# Altium PCB sensors_0v2.PcbDoc
Units mm, origin at the board's own origin, x right, y up, seen from the top; angles counter-clockwise.
Board outline 100 x 100 mm, 2 copper layers (Top Layer, Bottom Layer); 149 components, 94 nets, 458 pads, 210 vias.
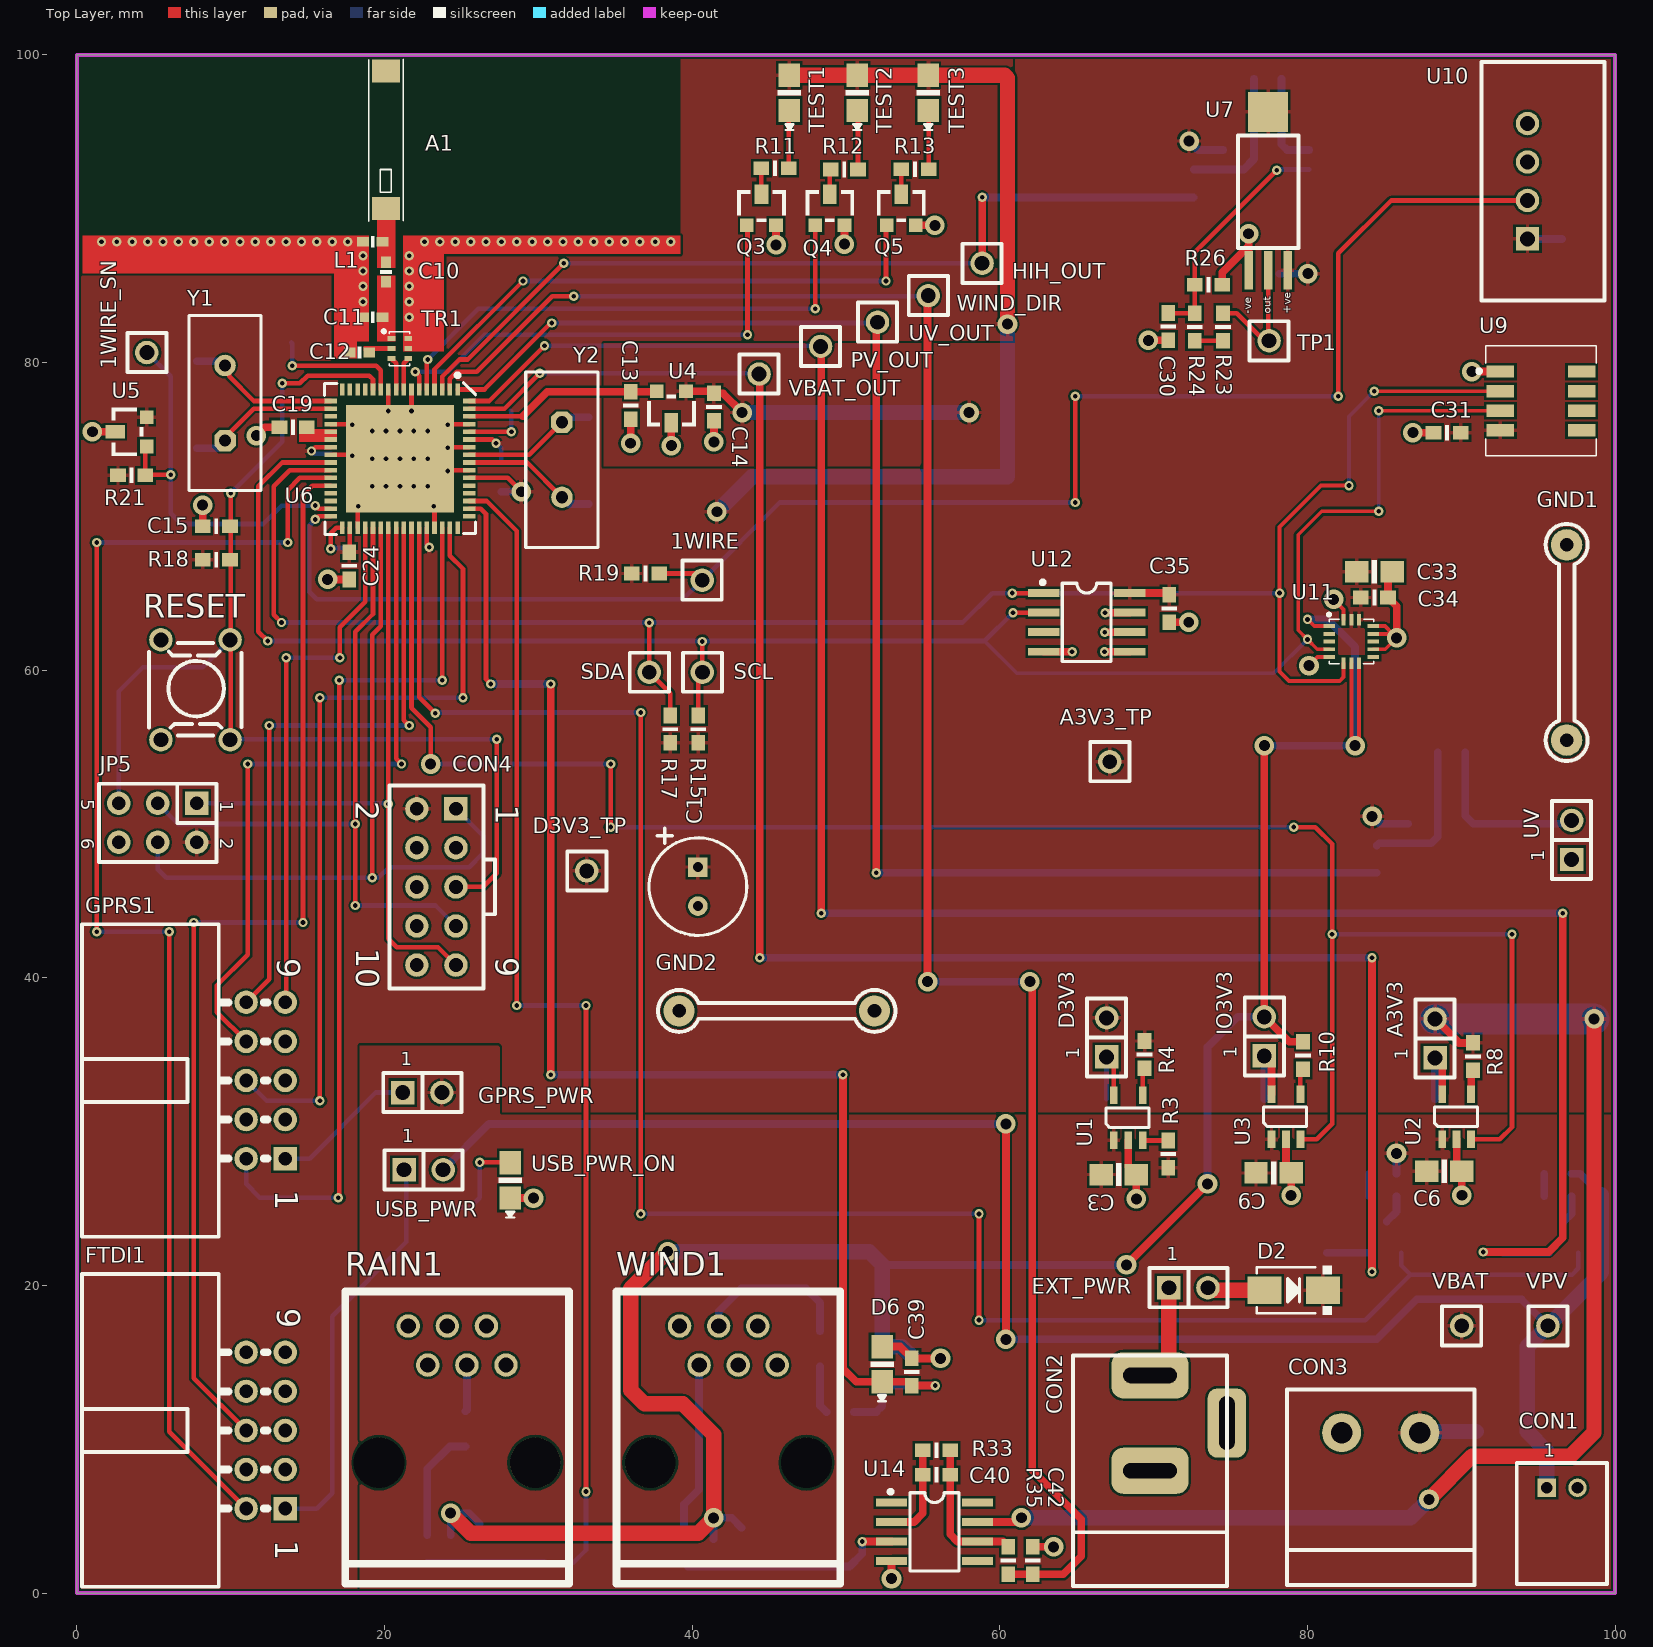
[diagram p0: Top Layer view]
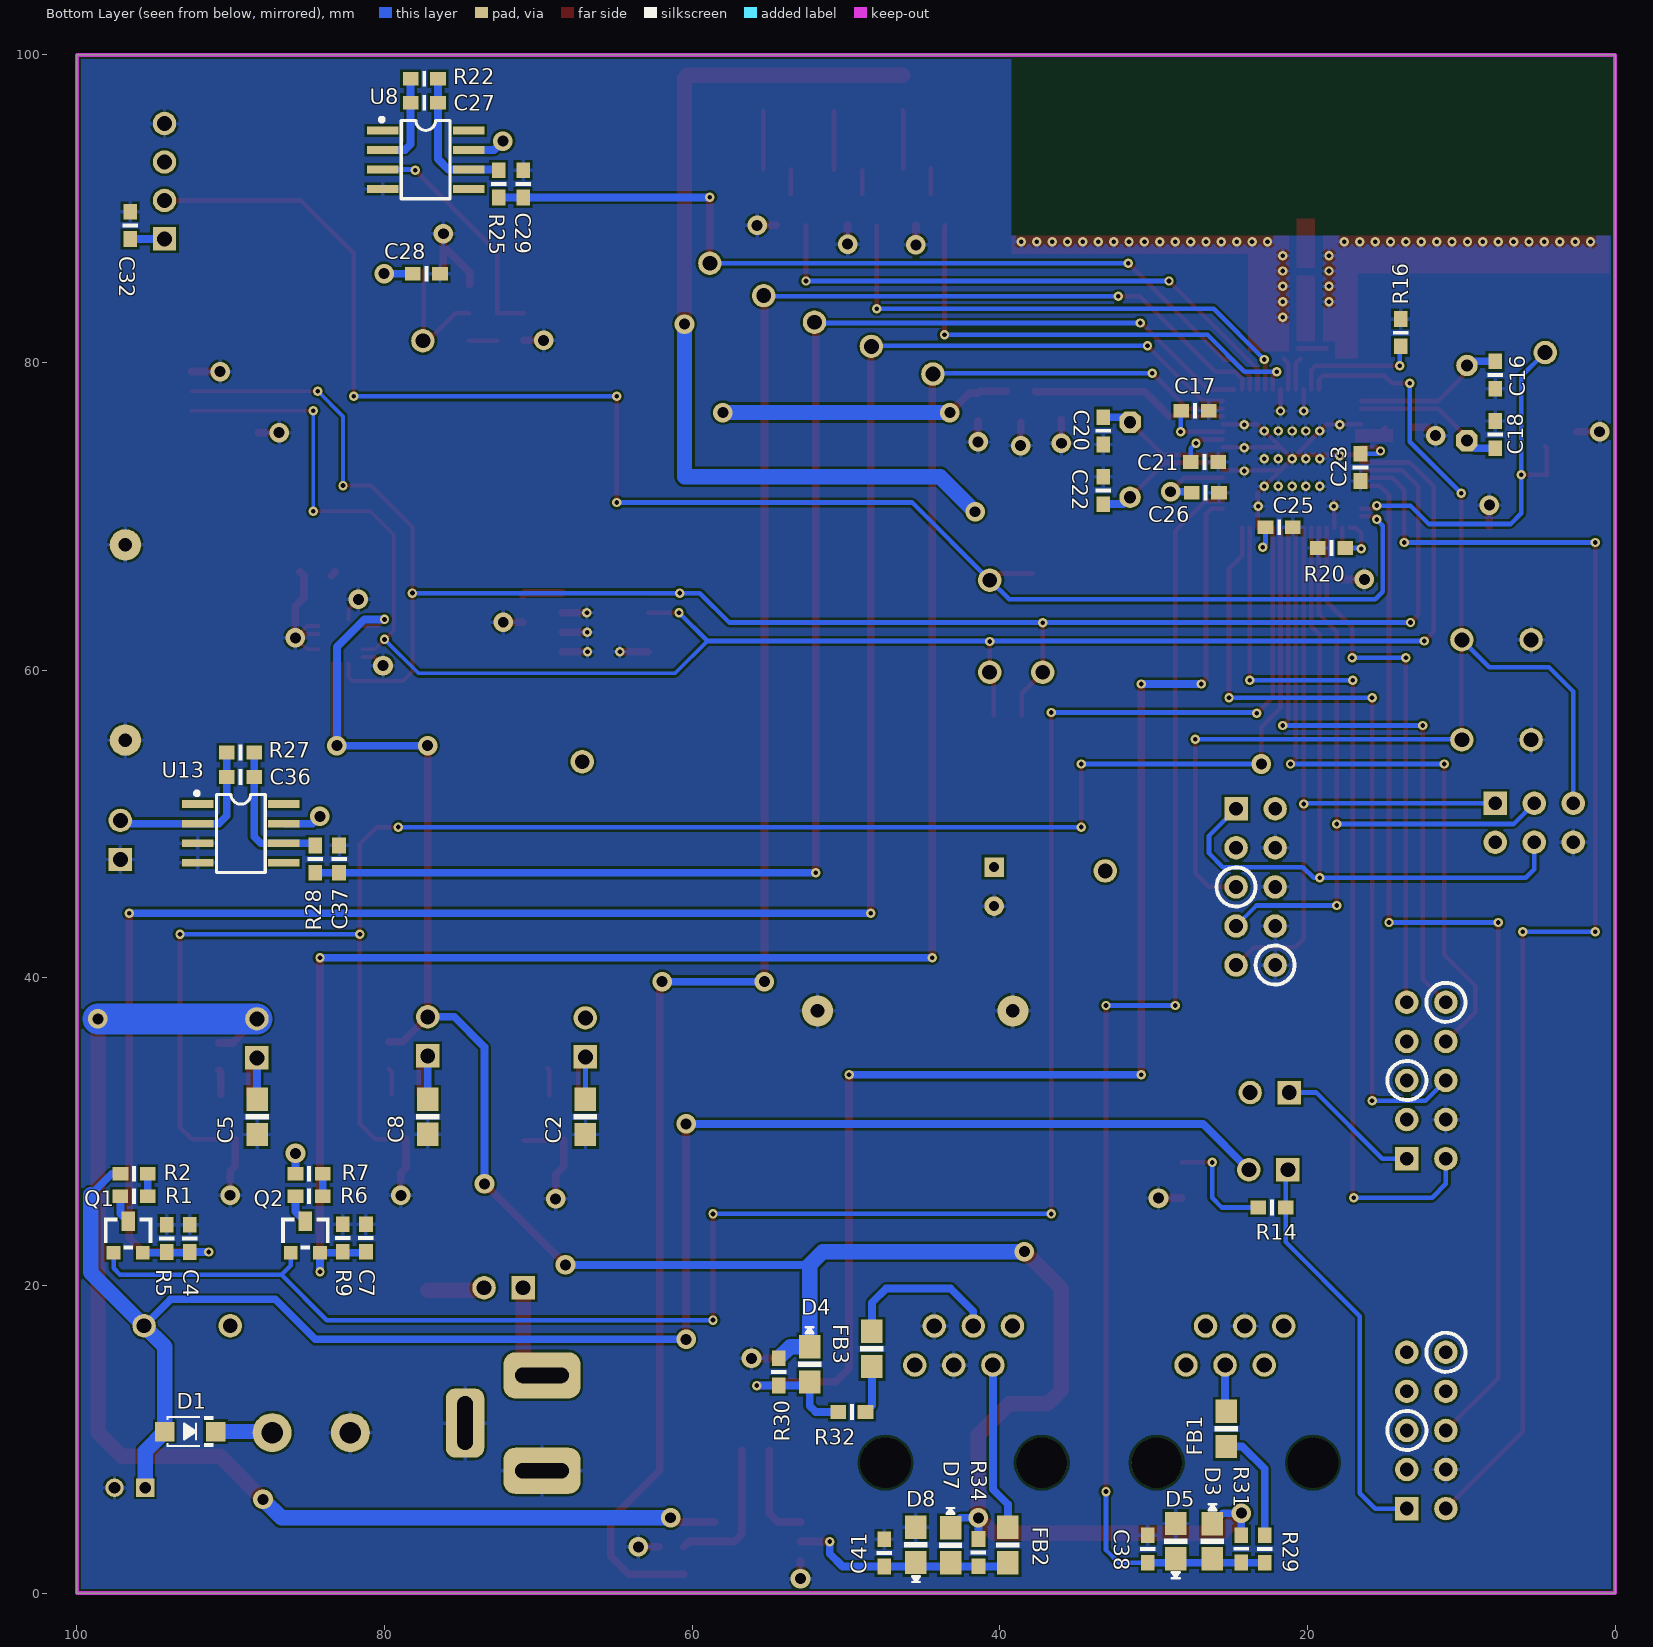
[diagram p1: Bottom Layer view, seen from below]

## Layer stack, top to bottom
Top Layer: signal copper 0.0356
Dielectric: dielectric 0.32, FR-4, Dk 4.8
Bottom Layer: signal copper 0.0356

## Board outline
0,0 100,0 100,100 0,100 0,0

## Design rules (kind name [scope] priority, off if disabled: settings)
Clearance [All] p1: gap=0.152
HoleSize [All] p1: absolutevalues=TRUE maxlimit=2.54 minlimit=0.305 maxpercent=80.000 minpercent=20.000
PolygonConnect [All] p1: connectstyle=Relief reliefconductorwidth=0.254 reliefentries=4 polygonreliefangle="90 Angle"
RoutingVias [All] p1: holewidth=0.508 width=0.762 viastyle="Through Hole" minholewidth=0.305 minwidth=0.61 maxholewidth=0.711 maxwidth=1.27
SilkscreenOverComponentPads [All] p1: minsilkscreentomaskgap=0.254
SolderMaskExpansion [All] p1: expansion=0.102
Width [All] p1: maxlimit=2.54 minlimit=0.152 preferedwidth=0.254
26 further rules are at their usual default settings.

## Classes and differential pairs
component class U_weatherstation: C38 C39 C40 C41 C42 D3 D4 D5 D6 D7 D8 FB1 FB2 FB3 R29 R30 R31 R32 R33 R34 R35 RAIN1 U14 WIND1
component class U_uv: C36 C37 R27 R28 U13 UV
component class U_temperature: C35 U12
component class U_pressure: C33 C34 U11
component class U_power: A3V3_TP C1 C2 C3 C4 C5 C6 C7 C8 C9 CON1 CON2 CON3 D1 D2 D3V3_TP EXT_PWR IO3V3 Q1 Q2 R1 R2 R3 R4 R5 R6 R7 R8 R9 R10 U1 U2 U3 VBAT VPV
component class U_humidity: C27 C28 C29 C30 C31 C32 R22 R23 R24 R25 R26 TP1 U7 U8 U9 U10
component class U_atmega128rf: 1WIRE 1WIRE_SN A1 A3V3_TP C10 C11 C12 C13 C14 C15 C16 C17 C18 C19 C20 C21 C22 C23 C24 C25 C26 CON4 D3V3_TP FTDI1 GND1 GND2 GPRS1 GPRS_PWR HIH_OUT JP5 L1 PV_OUT Q3 Q4 Q5 R11 R12 R13 R14 R15 R16 R17 R18 R19 R20 R21 RESET SCL SDA TEST1 TEST2 TEST3 TR1 U4 U5 U6 USB_PWR USB_PWR_ON UV_OUT VBAT_OUT WIND_DIR Y1 Y2

## Components (designator, comment, footprint, x,y, rotation, side; value= is the part's Value field where it differs from the comment)
1WIRE "Test Point" TERMINAL 40.65,65.85 r90 top
1WIRE_SN "Test Point" TERMINAL 4.55,80.65 r90 top
A1 "2450AT45A100E" 2450AT45A100E 20.1,89.95 r90 top
A3V3 "2P" SIP-2 88.295,34.791 r90 top
A3V3_TP "Test Point" TERMINAL 67.15,54.05 r90 top
C1 "100uF" RADIAL-2.5MM 40.374,47.202 r270 top
C2 "10uF" 0805 66.937,29.813 r90 bottom
C3 "4.7uF" 0805 68.875,27.213 r180 top
C4 "10nF" 0603 92.659,23.954 r270 bottom
C5 "1uF" 0805 88.287,29.813 r90 bottom
C6 "4.7uF" 0805 90.034,27.413 r180 top
C7 "10nF" 0603 81.209,23.97 r270 bottom
C8 "1uF" 0805 77.187,29.831 r90 bottom
C9 "4.7uF" 0805 78.941,27.313 r180 top
C10 "1.5pF" 0402 20.1,85.25 r90 top (schematic designator C4)
C11 "1.5pF" 0402 18.6,82.95 r0 top (schematic designator C5)
C12 "22pF" 0402 19,80.65 r180 top (schematic designator C8)
C13 "1uF" 0603 36.003,78.1 r270 top
C14 "1uF" 0603 41.415,78.001 r270 top
C15 "10nF" 0603 9.951,69.359 r180 top
C16 "12pF" 0603 7.8,78.299 r90 bottom
C17 "1uF" 0603 28.201,76.863 r180 bottom
C18 "12pF" 0603 7.8,76.201 r270 bottom
C19 "1uF" 0603 14.951,75.8 r180 top
C20 "12pF" 0603 33.28,76.451 r270 bottom
C21 "1uF" 0603 25.799,73.535 r0 bottom
C22 "12pF" 0603 33.28,70.799 r90 bottom
C23 "1uF" 0603 16.552,72.299 r90 bottom
C24 "1uF" 0603 17.705,65.899 r90 top
C25 "1uF" 0603 20.949,69.297 r0 bottom
C26 "1uF" 0603 25.749,71.539 r0 bottom
C27 "100pF" 0603 78.305,96.896 r180 bottom
C28 "100nF" 0603 76.395,85.775 r0 bottom
C29 "100nF" 0603 70.99,92.505 r270 bottom
C30 "100nF" 0603 70.956,81.445 r90 top
C31 "100nF" 0603 88.195,75.445 r0 top
C32 "100nF" 0603 96.539,89.805 r270 bottom
C33 "10uF" 0805 85.498,66.389 r180 top
C34 "100nF" 0603 85.236,64.727 r180 top
C35 "100nF" 0603 71.005,63.116 r90 top
C36 "100pF" 0603 90.256,53.059 r180 bottom
C37 "100nF" 0603 82.955,48.606 r270 bottom
C38 "10nF" 0603 30.38,3.757 r270 bottom
C39 "10nF" 0603 54.28,15.257 r270 top
C40 "100pF" 0603 54.993,7.69 r0 top
C41 "100pF" 0603 47.523,3.507 r270 bottom
C42 "100nF" 0603 62.143,3.007 r270 top
CON1 "2P" JST-2MM 95.555,6.851 r0 top
CON2 "3P" JACKPOW/PD-2.5MM-TH 69.764,14.154 r270 top
CON3 "2P" INTERLOCK2-5MM 87.304,10.431 r180 top
CON4 "ICSP" IDC-10-F 24.644,50.989 r270 top
D1 "PMEG2010E" SOD-123 94.288,10.505 r180 bottom
D2 "RGF1D" DO-214BA 79.101,19.687 r0 top
D3 "MCL4148" 0805@DIODE 26.182,2.223 r90 bottom
D3V3 "2P" SIP-2 66.945,34.855 r90 top
D3V3_TP "Test Point" TERMINAL 33.15,46.95 r90 top
D4 "MCL4148" 0805@DIODE 52.364,13.723 r90 bottom
D5 "MCL4148" 0805@DIODE 28.566,4.527 r270 bottom
D6 "MCL4148" 0805@DIODE 52.344,16.027 r270 top
D7 "MCL4148" 0805@DIODE 43.205,1.973 r90 bottom
D8 "MCL4148" 0805@DIODE 45.459,4.277 r270 bottom
EXT_PWR "2P" SIP-2 70.989,19.855 r0 top
FB1 "150Z_100MHz" 0805 25.267,9.533 r90 bottom
FB2 "150Z_100MHz" 0805 39.472,4.269 r270 bottom
FB3 "150Z_100MHz" 0805 48.314,17.019 r270 bottom
FTDI1 "10P" IDC-10-90 12.27,10.575 r270 top
GND1 "Test Point" TEST-PROBE2 96.85,55.45 r90 top
GND2 "Test Point" TEST-PROBE2 51.85,37.85 r180 top
GPRS1 "10P" IDC-10-90 12.27,33.325 r270 top
GPRS_PWR "2P" SIP-2 21.188,32.542 r0 top
HIH_OUT "Test Point" TERMINAL 58.85,86.45 r90 top
IO3V3 "2P" SIP-2 77.195,34.923 r90 top
JP5 "6P" DIL-6 7.795,51.347 r270 top
L1 "3.9nH" 0402 18.6,87.85 r0 top
PV_OUT "Test Point" TERMINAL 48.35,81.05 r90 top
Q1 "BSS138" SOT-23@GSD 97.615,22.132 r180 bottom
Q2 "BSS138" SOT-23@GSD 86.104,22.132 r180 bottom
Q3 "BSS138" SOT-23@GSD 43.549,88.918 r0 top
Q4 "BSS138" SOT-23@GSD 47.994,88.918 r0 top
Q5 "BSS138" SOT-23@GSD 52.639,88.918 r0 top
R1 "20k" 0603 97.17,25.791 r180 bottom
R2 "20k" 0603 95.39,27.259 r0 bottom
R3 "10k" 0603 70.941,29.425 r270 top
R4 "100k" 0603 69.409,34.114 r90 top
R5 "20k" 0603 94.159,23.954 r270 bottom
R6 "20k" 0603 85.79,25.791 r180 bottom
R7 "20k" 0603 84.011,27.259 r0 bottom
R8 "100k" 0603 90.759,33.991 r90 top
R9 "20k" 0603 82.709,23.97 r270 bottom
R10 "100k" 0603 79.712,34.063 r90 top
R11 "470R" 0603 44.499,92.628 r0 top
R12 "470R" 0603 48.999,92.548 r0 top
R13 "470R" 0603 53.599,92.56 r0 top
R14 "470R" 0603 23.201,25.066 r180 bottom
R15 "10k" 0603 40.404,57.051 r270 top
R16 "10K" 0603 13.942,81.049 r90 bottom
R17 "10k" 0603 38.58,57.051 r270 top
R18 "10K" 0603 9.951,67.187 r180 top
R19 "2.2k" 0603 37.851,66.282 r180 top
R20 "10K" 0603 17.549,67.94 r0 bottom
R21 "2.2k" 0603 4.451,72.664 r180 top
R22 "10K" 0603 78.305,98.449 r180 bottom
R23 "20K" 0603 74.509,83.205 r270 top
R24 "20K" 0603 72.667,83.205 r270 top
R25 "300R" 0603 72.582,92.505 r270 bottom
R26 "20K" 0603 74.455,85.048 r180 top
R27 "300R" 0603 90.256,54.651 r180 bottom
R28 "300R" 0603 84.513,48.606 r270 bottom
R29 "200R" 0603 22.784,3.757 r270 bottom
R30 "10K" 0603 54.374,13.493 r90 bottom
R31 "10K" 0603 24.3,1.993 r90 bottom
R32 "200R" 0603 50.507,11.778 r180 bottom
R33 "10K" 0603 54.993,9.282 r0 top
R34 "220K" 0603 41.391,1.743 r90 bottom
R35 "300R" 0603 60.551,3.007 r270 top
RAIN1 "RJ25" RJ25 21.546,17.366 r0 top
RESET "SW1" MICROSWITCH 5.462,61.973 r0 top
SCL "Test Point" TERMINAL 40.661,59.865 r90 top
SDA "Test Point" TERMINAL 37.212,59.865 r90 top
TEST1 "LED" 0805@DIODE 46.318,98.671 r270 top
TEST2 "LED" 0805@DIODE 50.736,98.671 r270 top
TEST3 "LED" 0805@DIODE 55.346,98.671 r270 top
TP1 "Test Point" TERMINAL 77.506,81.411 r0 top
TR1 "2450FB15L0001E" 0805@BALUN 21.45,80.25 r90 top
U1 "MCP1824T" SOT-23-5 67.409,29.447 r90 top
U2 "MCP1824T" SOT-23-5 88.759,29.51 r90 top
U3 "MCP1824T" SOT-23-5 77.659,29.515 r90 top
U4 "REF3312" SOT-23 39.598,78.132 r180 top
U5 "DS2411" SOT-23 4.532,74.546 r90 top
U6 "ATmega128RFA1" QFN-64@EP 21,73.75 r270 top (schematic designator U4)
U7 "HIH-5031" HIH 76.174,85.997 r0 top
U8 "MCP6071" SOIC-8 77.324,93.187 r180 bottom
U9 "SHT11" SHT 92.541,79.408 r0 top
U10 "DHT22" DHT22 94.304,88.036 r90 top
U11 "LPS331AP" HCLGA-16 81.428,62.861 r0 top
U12 "TMP175" SOIC-8 65.649,63.108 r0 top
U13 "MCP6V26" SOIC-8 89.343,49.386 r180 bottom
U14 "MCP6071" SOIC-8 55.753,3.985 r0 top
USB_PWR "2P" SIP-2 21.271,27.52 r0 top
USB_PWR_ON "LED" 0805@DIODE 28.168,27.971 r270 top
UV "2P" SIP-2 97.175,47.694 r90 top
UV_OUT "Test Point" TERMINAL 52.05,82.622 r90 top
VBAT "Test Point" TERMINAL 90.028,17.379 r90 top
VBAT_OUT "Test Point" TERMINAL 44.35,79.25 r90 top
VPV "Test Point" TERMINAL 95.631,17.379 r90 top
WIND1 "RJ25" RJ25 39.179,17.366 r0 top
WIND_DIR "Test Point" TERMINAL 55.35,84.35 r90 top
Y1 "32.768kHz" HC-49U 9.63,77.37 r90 top
Y2 "16MHz" HC-49U 31.533,73.68 r270 top

## Footprints (in the part's own frame and the unit in brackets; to place one, negate y for a bottom-side part, rotate by r counter-clockwise, add the part's x,y. Pads: shape width x height; smd on the part's side, far side on the other; paste and mask are expansions set on the pad)
0402 [mil]
  rect 30x25 smd: 1(0,0) 2(50,0)
  silkscreen extent 20,-15 30,15
0603 [mil]
  rect 40x35 smd: 1(0,0) 2(70,0)
  silkscreen extent 30,-20 40,20
0805 [mil]
  rect 60x55 smd: 1(0,0) 2(90,0)
  silkscreen extent 38,-30 52,30
0805@BALUN [mm]
  rect 0.32x0.5 smd: 1(1.3,1) 2(0.65,1) 3(0,1) 4(0,-0.1) 5(0.65,-0.1) 6(1.3,-0.1)
  silkscreen extent -0.46,-0.2 1.88,1.6
0805@DIODE [mil]
  rect 60x55 smd: A(0,0) K(90,0)
  silkscreen extent 38,-30 140,30
2450AT45A100E [mm]
  rect 1.5x1.8 smd: 1(0.05,0) ""(9,0)
  silkscreen extent -0.75,-1.12 9.75,1.12
DHT22 [mil] "DHT22 humidity sensor footprint"
  rect 60x60 hole 38: 1(0,0)
  round 60 hole 38: 2(98.43,0) 3(196.85,0) 4(295.28,0)
  silkscreen extent -157,-197 453,118
DIL-6 [mil] "Dual inline 2x3 pins 2.54mm pitch"
  rect 60x60 hole 35: 1(0,0)
  round 60 hole 35: 2(100,0) 3(0,-100) 4(100,-100) 5(0,-200) 6(100,-200)
  silkscreen extent -50,-250 150,50
DO-214BA [mm] "Small Signal Schottky Diode"
  rect 2.2x1.8 smd: A(-1.9,0) K(1.9,0)
  silkscreen extent -2.4,-1.6 2.5,1.6
HC-49U [mm] "Quartz Crystal, Thru-Hole; 2 Leads; Body 11.35 x 4.65 x 13.46 mm (LxWxH max)"
  oct 1.4x1.4 hole 0.8: 1(-2.44,0)
  round 1.4 hole 0.8: 2(2.44,0)
  silkscreen extent -5.7,-2.35 5.7,2.35
HCLGA-16 [mm]
  rect 0.75x0.25 smd: 1(0,0) 2(0,-0.5) 3(0,-1) 4(0,-1.5) 5(0,-2) 9(2.85,-2) 10(2.85,-1.5) 11(2.85,-1) 12(2.85,-0.5) 13(2.85,0)
  rect 0.25x0.75 smd: 6(0.925,-2.425) 7(1.425,-2.425) 8(1.925,-2.425) 14(1.925,0.425) 15(1.425,0.425) 16(0.925,0.425)
  silkscreen extent -0.12,-2.45 2.88,0.85
HIH [mm] "Honeywell Humidity Sensor"
  rect 0.55x2.5 smd: 1(0,0) 2(1.27,0) 3(2.54,0)
  rect 2.6x2.6 smd: PAD(1.27,10.3)
  silkscreen extent -0.7,1.45 3.25,8.77
IDC-10-90 [mil]
  rect 60x60 hole 35: 1(200,50)
  round 60 hole 35: 2(200,-50) 3(100,50) 4(100,-50) 5(0,50) 6(0,-50) 7(-100,50) 8(-100,-50) 9(-200,50) 10(-200,-50)
  silkscreen extent -400,-470 400,5
IDC-10-F [mil]
  rect 60x60 hole 35: 1(0,0)
  round 60 hole 35: 2(0,-100) 3(100,0) 4(100,-100) 5(200,0) 6(200,-100) 7(300,0) 8(300,-100) 9(400,0) 10(400,-100)
  silkscreen extent -60,-170 460,100
INTERLOCK2-5MM [mil]
  round 100 hole 55: 1(0,0) 2(200,0)
  silkscreen extent -140,-110 340,390
JACKPOW/PD-2.5MM-TH [mm] "Jack Power 2.5mm with insertion detect - Through Hole"
  rrect50% 3x5 hole 1 slot 3.5 at 90 deg: 1(0,0) 2(6.2,0)
  rrect50% 4.5x2.5 hole 1 slot 3.5 at 0 deg: 3(3.1,5)
  silkscreen extent -1.3,-5 13.7,5
JST-2MM [mm] "JST 2mm header side entry"
  rect 1.2x1.2 hole 0.762: 1(0,0)
  round 1.2 hole 0.762: 2(2,0)
  silkscreen extent -1.95,-6.25 3.93,1.6
MICROSWITCH [mil]
  round 60 hole 38: 1(0,0) 2(177.16,0) 3(0,-255.91) 4(177.16,-255.91)
  silkscreen extent -30,-245 206,-8
QFN-64@EP [mm]
  rect 0.8x0.3 smd: 1(-4.5,3.75) 2(-4.5,3.25) 3(-4.5,2.75) 4(-4.5,2.25) 5(-4.5,1.75) 6(-4.5,1.25) 7(-4.5,0.75) 8(-4.5,0.25) 9(-4.5,-0.25) 10(-4.5,-0.75) 11(-4.5,-1.25) 12(-4.5,-1.75) 13(-4.5,-2.25) 14(-4.5,-2.75) 15(-4.5,-3.25) 16(-4.5,-3.75) 33(4.5,-3.75) 34(4.5,-3.25) 35(4.5,-2.75) 36(4.5,-2.25) 37(4.5,-1.75) 38(4.5,-1.25) 39(4.5,-0.75) 40(4.5,-0.25) 41(4.5,0.25) 42(4.5,0.75) 43(4.5,1.25) 44(4.5,1.75) 45(4.5,2.25) 46(4.5,2.75) 47(4.5,3.25) 48(4.5,3.75)
  rect 0.3x0.8 smd: 17(-3.75,-4.5) 18(-3.25,-4.5) 19(-2.75,-4.5) 20(-2.25,-4.5) 21(-1.75,-4.5) 22(-1.25,-4.5) 23(-0.75,-4.5) 24(-0.25,-4.5) 25(0.25,-4.5) 26(0.75,-4.5) 27(1.25,-4.5) 28(1.75,-4.5) 29(2.25,-4.5) 30(2.75,-4.5) 31(3.25,-4.5) 32(3.75,-4.5) 49(3.75,4.5) 50(3.25,4.5) 51(2.75,4.5) 52(2.25,4.5) 53(1.75,4.5) 54(1.25,4.5) 55(0.75,4.5) 56(0.25,4.5) 57(-0.25,4.5) 58(-0.75,4.5) 59(-1.25,4.5) 60(-1.75,4.5) 61(-2.25,4.5) 62(-2.75,4.5) 63(-3.25,4.5) 64(-3.75,4.5)
  rect 7x7 smd: PAD(0,0)
  silkscreen extent -5.55,-4.9 4.93,4.92
RADIAL-2.5MM [mil]
  rect 50x50 hole 26: 1(0,0)
  round 50 hole 26: 2(100,0)
  silkscreen extent -100,-125 175,125
RJ25 [mm]
  round 1.524 hole 1: 1(0,0) 2(1.27,-2.54) 3(2.54,0) 4(3.81,-2.54) 5(5.08,0) 6(6.35,-2.54)
  round 3.25 hole 3.3: ""(-1.905,-8.89) ""(8.255,-8.89)
  silkscreen extent -4.1,-16.76 10.45,2.24
SHT [mm] "Sensirion SHTx Humidity Sensor Footprint"
  rect 1.8x0.8 smd: 1(0,0.005) 2(0,-1.27) 3(0,-2.54) 4(0,-3.81) 5(5.28,-3.81) 6(5.28,-2.54) 7(5.28,-1.27) 8(5.28,0.005)
  silkscreen extent -1.51,-5.48 6.23,1.68
SIP-2 [mil]
  rect 60x60 hole 38: 1(0,0)
  round 60 hole 38: 2(100,0)
  silkscreen extent -50,-50 150,50
SOD-123 [mil]
  rect 50x50 smd: A(0,0) K(130,0)
  silkscreen extent 5,-40 125,40
SOIC-8 [mil] "Small Outline 8 leads Body Size 150mils"
  rect 80x20 smd: 1(-110,75) 2(-110,25) 3(-110,-25) 4(-110,-75) 5(110,-75) 6(110,-25) 7(110,25) 8(110,75)
  silkscreen extent -117,-100 63,107
SOT-23 [mil]
  rect 35x35 smd: 1(0,0) 2(75,0)
  rect 35x50 smd: 3(37.5,80)
  silkscreen extent -25,8 100,90
SOT-23-5 [mil]
  rect 45x20 smd: 1(0,0) 2(0,-37) 3(0,-74) 4(115,-74) 5(115,0)
  silkscreen extent 32,-90 82,20
SOT-23@GSD [mil] "SOT-23 (1-Gate , 2-Source, 3-Drain)"
  rect 35x50 smd: D(37.5,80)
  rect 35x35 smd: G(0,0) S(75,0)
  silkscreen extent -25,8 100,90
TERMINAL [mil]
  round 60 hole 37.99: 1(0,0)
  silkscreen extent -50,-50 50,50
TEST-PROBE2 [mil]
  round 80 hole 35: 1(0,0) 1(500,0)
  silkscreen extent -54,-54 554,54

## Part data
1WIRE 1WIRE_SN A3V3_TP D3V3_TP GND1 GND2 HIH_OUT PV_OUT SCL SDA TP1 UV_OUT VBAT VBAT_OUT VPV WIND_DIR: library part TEST-PROBE, "Test/Probe Point"
A1: library part "Antenna SE", "ANTENNA"
A3V3 D3V3 EXT_PWR GPRS_PWR IO3V3 USB_PWR UV: library part JMP2, "2-pin Jumper"
C1: library part "CAP POL", "Polarized Capacitor"
C2 C3 C4 C5 C6 C7 C8 C9 C10 C11 C12 C13 C14 C15 C16 C17 C18 C19 C20 C21 C22 C23 C24 C25 C26 C27 C28 C29 C30 C31 C32 C33 C34 C35 C36 C37 C38 C39 C40 C41 C42: library part CAP, "Capacitor"
CON1 CON3: library part CON02, "Connector 2 pins"
CON2: library part "JACK POWER PD", "Jack Power with insertion detect"
CON4 FTDI1 GPRS1: library part CON10, "Connector 10 Pins"
D1: library part "Diode Schottky", "Small Signal Schottky Diode"
D2 D3 D4 D5 D6 D7 D8: library part Diode, "Vishay Standard Avalanche Sinterglass Diode"
FB1 FB2 FB3: library part FERRITE-BEAD-AXIAL, "Ferrite bead"
JP5: library part JMP6, "6-Pin Jumper"
L1: library part IND, "Inductor"
Q1 Q2 Q3 Q4 Q5: library part MOSFET-N, "N-Channel Logic Level Enhancement Mode Field Effect Transistor"
R1 R2 R3 R4 R5 R6 R7 R8 R9 R10 R11 R12 R13 R14 R15 R16 R17 R18 R19 R20 R21 R22 R23 R24 R25 R26 R27 R28 R29 R30 R31 R32 R33 R34 R35: library part RES, "Resistor"
RAIN1 WIND1: "RJ25 Connector"
RESET: "Switch Push Button"
TEST1 TEST2 TEST3 USB_PWR_ON: "Light emitting diode"
TR1: "FILTER BALUN ATMEL 2.45GHZ"
U1 U2 U3: "300 mA, Low Voltage, Low Quiescent Current LDO Regulator, 5-Pin SOT-23, Extended Temperature, Tape and Reel"
U4: "Voltage Reference 1.25V, 30ppm/degC, 5mA"
U5: "Silicon Serial Number"
U6: "802.15.4 compliant AVR transceiver"
U7: "Low Voltage Humidity Sensor"
U8 U14: library part MCP6V26, "Low-Offset Opamp"
U9 U10: "Digital Humidity and Temperature Sensor"
U11: "Pressure sensor, 260 - 1260 mbar"
U12: "Digital Temperature Sensor"
U13: "Low-Offset Opamp"
Y1 Y2: library part "Crystal Oscillator", "Crystal Oscillator"

## Via types
v1: diameter 0.61, hole 0.305, Top Layer to Bottom Layer, 161 vias
v2: diameter 1.27, hole 0.711, Top Layer to Bottom Layer, 49 vias

## Nets (pads, with @x,y where several pads share a name; then routed paths per layer and width w, separated by ;. In a path a pad name is that pad's centre, name@x,y a point inside that pad or via, vN(x,y) a via of type N, cw(c..) or ccw(c..) an arc to the next point about the centre after c; other vN are vias at no path point)
1WIRE: 1WIRE.1 R19.1 U6.32 U10.2 | length 108.6
  Top Layer w0.3: v1(15.5,69.8) 15.7,70 U6.32 ; R19.1 40.218,66.282 1WIRE.1 ; v1(64.9,70.9) v1(64.9,77.8) ; v1(82,77.8) 82,87.1 85.436,90.536 U10.2
  Bottom Layer w0.3: v1(15.5,69.8) 15.1,69.4 15.1,65.1 15.6,64.6 39.4,64.6 1WIRE.1 45.7,70.9 v1(64.9,70.9) ; v1(64.9,77.8) v1(82,77.8)
1WIRE_SN: 1WIRE_SN.1 R21.1 U5.1 U6.31 | length 25.9
  Top Layer w0.3: U5.1 4.451,74.465 R21.1 4.487,72.7 v1(6.1,72.7) ; v1(15.5,70.7) 15.7,70.5 U6.31
  Bottom Layer w0.3: 1WIRE_SN.1 6.1,79.1 v1(6.1,72.7) 6.1,70.2 6.8,69.5 12.1,69.5 13.3,70.7 v1(15.5,70.7)
A3V3: A3V3.2 A3V3_TP.1 C14.1 C28.2 C31.2 C32.2 C33.2 C34.2 C35.2 R8.2 U4.1 U7.3 U7.PAD U8.7 U9.4 U10.1 U11.14 U11.15 U12.8 U13.7 U14.7 | length 113.7
  Top Layer w0.5: U4.1 C14.1@41.284,78.132 ; C14.1 41.999,78.001 v2(43.25,76.75) ; U14.7 61.12,4.62 v2(61.4,4.9) ; A3V3.2 89.857,35.769 R8.2
  Top Layer w0.508: U12.8 70.886,65.013 C35.2 ; C33.2 C33.2@83.458,66.143
  Top Layer w1: v2(87.9,6.1) 90.7,8.9 97.1,8.9 98.631,10.431 v2(98.631,37.331)
  Bottom Layer w0.5: C28.2 v2(80.025,85.775) ; v2(84.2,50.5) 84.679,50.021 U13.7
  Bottom Layer w0.508: v2(72.3,94.4) 72.878,93.822 U8.7 ; U10.1 96.53,88.036 C32.2
  Bottom Layer w1: v2(43.25,76.75) v2(58,76.75) ; v2(61.4,4.9) 86.7,4.9 v2(87.9,6.1)
  Bottom Layer w2: A3V3.2 v2(98.631,37.331)
AREF: C13.1 U4.2 U6.62 | length 12.9
  Top Layer w0.3: U6.62 28.986,76.5
  Top Layer w0.5: 28.986,76.5 30.586,78.1 C13.1 37.661,78.1 U4.2
D3V3: C1.1 C21.2 C23.2 C24.2 C25.2 C26.2 CON4.2 D3V3.2 D3V3_TP.1 JP5.2 R4.2 R15.2 R17.2 R18.2 R19.2 R21.2 TEST1.A TEST2.A TEST3.A U5.2 U6.23 U6.34 U6.44 U6.54 U6.59 | length 75
  Top Layer w0.3: 15.5,74.5 U6.23 ; C24.2 17.75,67.722 U6.34 ; U6.44 22.75,68.15 v1(22.9,68) ; U6.54 28,72.5 v2(28.9,71.6) ; U6.59 27,75 v1(27.25,74.75)
  Top Layer w1: TEST1.A TEST2.A TEST3.A 60.329,98.671 60.5,98.5 v2(60.5,82.5)
  Bottom Layer w0.3: v1(15.25,74.25) 15.423,74.077 C23.2 ; C25.2 22.727,68.173 v1(22.9,68) ; v1(27.25,74.75) 27.577,74.423 C21.2 ; C26.2 C26.2@27.588,71.6
  Bottom Layer w0.5: C26.2@27.588,71.6 v2(28.9,71.6)
  Bottom Layer w1: v2(41.6,70.3) 43.875,72.575 60.5,72.575 v2(60.5,82.5)
EN_AVDD: U2.3 U3.3 U6.42 | length 126.9
  Top Layer w0.3: U6.42 21.75,57.55 23,56.3 v2(23,53.9) ; v1(34.7,49.8) v1(34.7,53.9) ; v1(79.1,49.8) 80.5,49.8 81.6,48.7 81.6,30.5 80.615,29.515 U3.3 ; U2.3 92.51,29.51 93.3,30.3 v1(93.3,42.825)
  Bottom Layer w0.3: v2(23,53.9) v1(34.7,53.9) ; v1(34.7,49.8) v1(79.1,49.8) ; v1(81.6,42.825) v1(93.3,42.825)
ENZ_2G: GPRS1.8 U6.40 | length 45.1
  Top Layer w0.3: GPRS1.8 9.1,37.765 9.1,39.5 11.1,41.5 v1(11.1,53.9) ; U6.40 20.75,54.25 v1(21.1,53.9)
  Bottom Layer w0.3: v1(11.1,53.9) v1(21.1,53.9)
GND: C1.2 C2.1 C3.1 C4.1 C5.1 C6.1 C7.1 C8.1 C9.1 C11.1 C12.2 C13.2 C14.2 C15.2 C16.1 C17.2 C18.1 C19.2 C20.2 C21.1 C22.2 C23.1 C24.1 C25.1 C26.1 C28.1 C29.1 C30.1 C31.1 C32.1 C33.1 C34.1 C35.1 C37.1 C38.1 C39.1 C41.1 C42.1 CON1.2 CON2.2 CON2.3 CON3.2 CON4.4 CON4.6 CON4.8 CON4.10 D5.A D6.A D8.A FTDI1.4 GND1.1 GND2.1 GPRS1.4 JP5.6 L1.1 Q3.S Q4.S Q5.S R5.1 R9.1 R16.2 R20.2 R26.1 RAIN1.3 RESET.1 RESET.3 TR1.5 TR1.6 U1.2 U2.2 U3.2 U4.3 U5.3 U6.7 U6.10 U6.20 U6.24 U6.35 U6.45 U6.55 U6.58 U6.61 U6.PAD U7.1 U8.4 U9.1 U10.4 U11.5 U11.10 U11.12 U11.13 U11.16 U12.4 U12.5 U12.6 U12.7 U13.3 U13.4 U14.4 USB_PWR_ON.K UV.1 WIND1.4 WIND1.5 | length 97.3
  Top Layer w0.25: v2(80.1,60.3) 80.661,60.861 U11.5 ; v2(81.7,64.6) 82.353,63.947 U11.16 ; U11.10 85.061,61.361 v2(85.8,62.1) v2@85.539,62.361 ; U11.12 v2@85.539,62.361 ; U11.13 85.039,62.861 v2@85.539,62.361
  Top Layer w0.3: U6.24 19.2,74 U6.PAD@20.75,74 ; U6.20 18.75,76 v1(21,73.75) ; U6.35 U6.PAD@18.25,71 ; v1(20.25,76.85) U6.10 ; U6.PAD@21.75,73 U6.55 ; U6.PAD@21.75,74.5 U6.58 ; v1(21.75,76.85) U6.7 ; U6.45 23.25,71.5 v1(21,73.75) ; U6.61 23.25,76 v1(21,73.75)
  Top Layer w0.5: v2(1.001,75.499) U5.3 ; C15.2 v2(8.173,70.727) ; v2(11.673,75.25) 12.223,75.8 C19.2 ; v2(16.305,65.905) 16.311,65.899 C24.1 ; USB_PWR_ON.K v2(29.685,25.685) ; v2(36.003,74.753) C13.2 ; v2(38.646,74.605) U4.3 ; v2(41.415,74.835) C14.2 ; v2(45.454,87.646) Q3.S ; v2(49.899,87.701) Q4.S ; D6.A 53.51,16.027 C39.1 v2(56.143,15.257) ; v2(52.959,0.941) U14.4 ; Q5.S v2(55.782,88.918) ; C42.1 v2(63.493,3.007) ; U12.4 v1(64.697,61.203) ; v1(66.803,61.203) U12.5 ; v1(66.827,62.473) U12.6 ; v1(66.843,63.743) U12.7 ; U1.2 68.349,27.739 C3.1 v2(68.875,25.625) ; v2(69.655,81.445) C30.1 ; C35.1 v2(72.284,63.116) ; R26.1 74.455,85.855 76.174,87.574 ; U7.1 76.174,87.574 ; v2(76.174,88.374) 76.174,87.574 ; U3.2 78.599,27.655 C9.1 v2(78.941,25.859) ; C33.1 85.236,66.127 C34.1 85.8,64.163 v2(85.8,62.1) ; v2(86.855,75.445) C31.1 ; U2.2 89.699,27.748 C6.1 v2(90.034,25.866) ; v2(90.687,79.413) U9.1
  Bottom Layer w0.5: v1(64.697,61.203) v1@64.7,61.2
  other v1: 18.3,70.65 23.2,70.65 19.2,71.95 20.1,71.95 21,71.95 21.9,71.95 22.8,71.95 24.1,72.95 19.2,73.75 20.1,73.75 21.9,73.75 22.8,73.75 17.9,73.95 24.1,74.45 19.2,75.55 20.1,75.55 21,75.55 21.9,75.55 22.8,75.55 17.9,75.95 24.1,75.95 21.6,82.95 18.6,83.95 21.6,83.95 18.6,84.95 21.6,84.95 18.6,85.95 21.6,85.95 18.6,86.95 21.6,86.95 1.6,87.85 2.6,87.85 3.6,87.85 4.6,87.85 5.6,87.85 6.6,87.85 7.6,87.85 8.6,87.85 9.6,87.85 10.6,87.85 11.6,87.85 12.6,87.85 13.6,87.85 14.6,87.85 15.6,87.85 16.6,87.85 17.6,87.85 22.6,87.85 23.6,87.85 24.6,87.85 25.6,87.85 26.6,87.85 27.6,87.85 28.6,87.85 29.6,87.85 30.6,87.85 31.6,87.85 32.6,87.85 33.6,87.85 34.6,87.85 35.6,87.85 36.6,87.85 37.6,87.85 38.6,87.85
HIH_OUT: C29.2 HIH_OUT.1 R25.2 U6.3 | length 57
  Top Layer w0.3: U6.3 23.75,79.09 24.86,80.2 25.4,80.2 v1(31.65,86.45)
  Top Layer w0.5: HIH_OUT.1 v1(58.85,90.75)
  Bottom Layer w0.3: v1(31.65,86.45) HIH_OUT.1
  Bottom Layer w0.508: v1(58.85,90.75) 58.873,90.727 C29.2 R25.2
INT6: U6.52
INT7: U6.53
IO3V3: D3.K D4.K D7.K IO3V3.2 R10.2 R30.2 R31.2 R34.2 U11.1 U11.7 U11.8 | length 155.2
  Top Layer w0.25: v1(80,63.3) 80.439,62.861 U11.1 ; U11.7 82.853,55.337 v2(83.095,55.095) 83.353,55.353 U11.8
  Top Layer w0.5: v2(68.236,21.336) v2(73.5,26.6) ; v2(77.195,55.095) IO3V3.2 78.817,35.841 R10.2
  Top Layer w1: v2(24.3,5.2) 25.6,3.9 40.4,3.9 v2(41.391,4.891) 41.391,10.309 39.4,12.3 36.9,12.3 36,13.2 36,19.8 v2(38.4,22.2)
  Bottom Layer w0.5: R31.2 v2(24.3,5.2) 25.491,5.2 D3.K ; R34.2 v2(41.391,4.891) 42.573,4.891 D7.K ; 52.364,21.336 v2(68.236,21.336) ; v2(73.5,26.6) 73.5,35.5 75.463,37.463 IO3V3.2 ; v2(77.195,55.095) v2(83.095,55.095) 83.095,61.505 81.3,63.3 v1(80,63.3)
  Bottom Layer w1: v2(38.4,22.2) 51.5,22.2 52.364,21.336 D4.K 53.636,16.009 R30.2
LED1: Q3.G U6.6 | length 31
  Top Layer w0.3: v1(22,79.4) 22.25,79.15 U6.6 ; Q3.G 43.6,88.867 v1(43.6,81.8)
  Bottom Layer w0.3: v1(22,79.4) 24.1,79.4 26.5,81.8 v1(43.6,81.8)
LED2: Q4.G U6.5 | length 33.9
  Top Layer w0.3: U6.5 22.75,80.15 v1(22.8,80.2) ; v1(48,83.5) Q4.G@48,88.912
  Bottom Layer w0.3: v1(22.8,80.2) 26.1,83.5 v1(48,83.5)
LED3: Q5.G U6.4 | length 36.7
  Top Layer w0.3: U6.4 23.25,79.55 v1(29,85.3) ; v1(52.6,85.3) 52.6,88.879 Q5.G
  Bottom Layer w0.3: v1(29,85.3) v1(52.6,85.3)
MISO: CON4.9 JP5.1 U6.39 | length 44.3
  Top Layer w0.3: U6.39 20.25,51.45 20.247,51.447 v1(20.247,51.3) 20.247,42.553 20.8,42 23.473,42 CON4.9
  Bottom Layer w0.3: JP5.1 20.2,51.347 v1(20.247,51.3)
MOSI: CON4.1 JP5.4 U6.38 | length 50.4
  Top Layer w0.3: v1(19.2,46.5) 19.2,62.3 19.75,62.85 U6.38
  Bottom Layer w0.3: JP5.4 5.255,47.045 5.8,46.5 v1(19.2,46.5) 19.6,46.5 20.3,47.2 25.5,47.2 26.4,48.1 26.4,49.233 CON4.1
NetA1_1: A1.1 C10.2 L1.2
NetA3V3_1: A3V3.1 C5.2 U2.5 | length 5.2
  Top Layer w0.5: A3V3.1 88.759,34.327 U2.5
  Bottom Layer w0.5: C5.2 88.287,34.783 A3V3.1
NetC2_2: C2.2 D3V3.1 U1.5 | length 5.4
  Top Layer w0.3: D3V3.1 67.409,34.391 U1.5
  Bottom Layer w0.3: C2.2 66.937,34.847 D3V3.1
NetC8_2: C8.2 IO3V3.1 U3.5 | length 5.5
  Top Layer w0.5: IO3V3.1 77.659,34.459 U3.5
  Bottom Layer w0.5: C8.2 77.187,34.915 IO3V3.1
NetC10_1: C10.1 C11.2 TR1.1
NetC12_1: C12.1 TR1.2
NetC16_2: C16.2 U6.17 Y1.2 | length 9.8
  Top Layer w0.3: Y1.2@9.9,79.69 9.9,79.1 11.5,77.5 U6.17
  Bottom Layer w0.5: C16.2 9.363,80.077 Y1.2
NetC17_1: C17.1 U6.60 | length 4.1
  Top Layer w0.3: U6.60 v1(28.25,75.5)
  Bottom Layer w0.3: C17.1 28.25,76.814 v1(28.25,75.5)
NetC18_2: C18.2 U6.18 Y1.1 | length 9.9
  Top Layer w0.3: Y1.1@9.9,74.81 9.9,75.4 11.5,77 U6.18
  Bottom Layer w0.5: C18.2 9.123,74.423 Y1.1
NetC19_1: C19.1 U6.21 U6.22 | length 3
  Top Layer w0.3: C19.1 C19.1@15.15,75.601 ; 15.15,75 U6.22 ; C19.1@15.15,75.5 U6.21
NetC20_1: C20.1 U6.57 Y2.1 | length 8.9
  Top Layer w0.3: U6.57 29.413,74 Y2.1
  Bottom Layer w0.3: Y2.1@31.533,76.033 Y2.1 Y2.1@31.864,76.451
  Bottom Layer w0.5: Y2.1@31.864,76.451 C20.1
NetC22_1: C22.1 U6.56 Y2.2 | length 9.1
  Top Layer w0.3: U6.56 29.273,73.5 Y2.2
  Bottom Layer w0.3: Y2.2@31.533,71.467 Y2.2 Y2.2@31.974,70.799
  Bottom Layer w0.5: Y2.2@31.974,70.799 C22.1
NetC27_1: C27.1 R22.1 U8.2 | length 6.2
  Bottom Layer w0.508: R22.1 78.305,94.195 78.678,93.822 U8.2
NetC27_2: C27.2 R22.2 R25.1 U8.6 | length 9.4
  Bottom Layer w0.508: R25.1@72.629,92.552 U8.6 75.852,92.552 76.527,93.227 R22.2
NetC30_2: C30.2 R24.1 R26.2 U8.3 | length 15.4
  Top Layer w0.3: C30.2 70.974,83.205 R24.1 72.667,85.038 R26.2 72.677,87.177 v1(78,92.5)
  Bottom Layer w0.3: v1(78,92.5) 78.052,92.552 U8.3
NetC36_1: C36.1 R27.1 U13.2 UV.2 | length 11.3
  Bottom Layer w0.5: R27.1 C36.1 90.256,50.544 90.779,50.021 U13.2 96.962,50.021 UV.2
NetC36_2: C36.2 R27.2 R28.1 U13.6 | length 9.7
  Bottom Layer w0.5: R28.1 84.658,48.751 U13.6 88.051,48.751 88.478,49.178 C36.2 R27.2
NetC40_1: C40.1 R33.1 U14.2 | length 6.4
  Top Layer w0.5: U14.2 54.42,4.62 54.993,5.193 R33.1
NetC40_2: C40.2 R33.2 R35.1 U14.6 | length 9.6
  Top Layer w0.5: R33.2 56.771,3.829 57.25,3.35 U14.6 60.208,3.35 R35.1
NetC41_2: C41.2 D7.A D8.K FB2.2 R34.1 U14.3 | length 14.4
  Top Layer w0.5: v1(51.05,3.35) U14.3
  Bottom Layer w0.5: FB2.2@39.726,1.729 45.459,1.729 C41.2 50.229,1.729 51.05,2.55 v1(51.05,3.35)
NetCON2_1: CON2.1 EXT_PWR.1 | length 6.2
  Top Layer w1: CON2.1 70.989,15.379 EXT_PWR.1
NetD2_A: D2.A EXT_PWR.2 | length 3.5
  Top Layer w1: EXT_PWR.2@73.697,19.687 D2.A
NetFB1_1: FB1.1 R29.1 | length 7.4
  Bottom Layer w0.5: R29.1 22.784,8.084 24.233,9.533 FB1.1
NetFB1_2: FB1.2 RAIN1.4 | length 3
  Bottom Layer w0.5: FB1.2 25.356,11.908 RAIN1.4
NetFB2_1: FB2.1 WIND1.2 | length 11.1
  Bottom Layer w0.5: FB2.1 39.472,5.772 40.449,6.749 WIND1.2 WIND1.2@40.354,14.731
NetFB3_1: FB3.1 WIND1.3 | length 10.4
  Bottom Layer w0.5: WIND1.3 41.719,18.319 43.2,19.8 47.4,19.8 48.314,18.886 FB3.1
NetFB3_2: FB3.2 R32.2 | length 3.1
  Bottom Layer w0.5: FB3.2 48.314,12.193 R32.2
NetFTDI1_1: FTDI1.1 R14.2 USB_PWR.1 | length 26.6
  Bottom Layer w0.3: FTDI1.1 15.595,5.495 16.6,6.5 16.6,18 21.423,22.823 R14.2 21.423,27.368 USB_PWR.1
NetGPRS1_1: GPRS1.1 GPRS_PWR.1 | length 9.4
  Bottom Layer w0.3: GPRS1.1 15.145,28.245 19.442,32.542 GPRS_PWR.1
NetQ1_D: Q1.D R1.1 | length 1.8
  Bottom Layer w0.5: Q1.D 97.17,24.671 R1.1
NetQ2_D: Q2.D R6.1 | length 1.9
  Bottom Layer w0.5: Q2.D 85.79,24.802 R6.1
NetQ3_D: Q3.D R11.1 | length 1.7
  Top Layer w0.3: Q3.D R11.1@44.501,92.625
NetQ4_D: Q4.D R12.1 | length 1.5
  Top Layer w0.3: Q4.D R12.1@48.946,92.495
NetQ5_D: Q5.D R13.1 | length 1.6
  Top Layer w0.3: Q5.D R13.1@53.592,92.553
NetR1_2: R1.2 R2.1 | length 1.5
  Bottom Layer w0.5: R1.2 R2.1@95.392,27.257
NetR3_1: R3.1 U1.3 | length 1.7
  Top Layer w0.3: U1.3 69.311,29.425 R3.1
NetR4_1: R4.1 U1.4 | length 1.8
  Top Layer w0.3: U1.4 69.289,33.994 R4.1
NetR6_2: R6.2 R7.1 | length 1.5
  Bottom Layer w0.5: R6.2 R7.1@84.012,27.258
NetR8_1: R8.1 U2.4 | length 1.6
  Top Layer w0.5: U2.4 90.639,33.871 R8.1
NetR10_1: R10.1 U3.4 | length 1.7
  Top Layer w0.3: U3.4 79.539,33.89 R10.1
NetR11_2: R11.2 TEST1.K | length 3.8
  Top Layer w0.3: R11.2 46.277,96.344 TEST1.K
NetR12_2: R12.2 TEST2.K | length 3.8
  Top Layer w0.3: R12.2 TEST2.K@50.777,96.344
NetR13_2: R13.2 TEST3.K | length 3.8
  Top Layer w0.3: R13.2 TEST3.K@55.377,96.354
NetR14_1: R14.1 USB_PWR_ON.A | length 7.5
  Top Layer w0.3: v1(26.2,28) 28.139,28 USB_PWR_ON.A
  Bottom Layer w0.3: R14.1 25.566,25.066 26.2,25.7 v1(26.2,28)
NetR16_1: R16.1 U6.11 | length 8.6
  Top Layer w0.3: v1(14,79.8) 19.45,79.8 19.75,79.5 U6.11
  Bottom Layer w0.3: R16.1@13.942,81.299 14,81.241 v1(14,79.8)
NetR20_1: R20.1 U6.33 | length 3
  Top Layer w0.3: v1(16.5,67.9) 16.5,68.9 16.85,69.25 U6.33
  Bottom Layer w0.3: v1(16.5,67.9) 16.54,67.94 R20.1
NetR23_1: R23.1 TP1.1 U7.2 | length 8.4
  Top Layer w0.3: R23.1 75.395,83.205 77.189,81.411 TP1.1 77.444,81.473 U7.2
NetR23_2: R23.2 R24.2 | length 1.8
  Top Layer w0.3: R24.2 R23.2
NetTR1_3: TR1.3 U6.9 | length 2.1
  Top Layer w0.3: TR1.3 20.75,79.95 U6.9
NetTR1_4: TR1.4 U6.8 | length 2.1
  Top Layer w0.3: U6.8 21.25,79.95 TR1.4
PD4: U6.29
PD5: U6.30
PE2: U6.48
PE3: U6.49
PG0: U6.14
PG1: U6.15
PG2: U6.16
PG5: U6.19
PV_OUT: C4.2 PV_OUT.1 Q1.S R5.2 U6.64 | length 140.4
  Top Layer w0.3: U6.64 26.8,77.5 v1(30.4,81.1)
  Top Layer w0.5: v1(48.4,44.2) PV_OUT.1@48.4,81.1 ; v1(91.424,22.176) 95.676,22.176 96.6,23.1 v1(96.6,44.2)
  Bottom Layer w0.3: v1(30.4,81.1) PV_OUT.1@48.4,81.1
  Bottom Layer w0.5: v1(48.4,44.2) v1(96.6,44.2) ; v1(91.424,22.176) C4.2 ; C4.2@92.703,22.132 Q1.S
RAIN: C38.2 D3.A D5.K R29.2 R31.1 U6.51 | length 85.3
  Top Layer w0.3: U6.51 26.65,71 28.6,69.05 v1(28.6,38.2) ; v1(33.1,6.6) v1(33.1,38.2)
  Bottom Layer w0.3: v1(28.6,38.2) v1(33.1,38.2) ; C38.2 32.279,1.979 33.1,2.8 v1(33.1,6.6)
  Bottom Layer w0.5: R29.2 26.182,1.979 C38.2
READ_VIN: Q1.G Q2.G U6.43 | length 130.4
  Top Layer w0.3: U6.43 22.25,58.25 v1(23.3,57.2) ; v1(36.65,24.65) v1(36.65,57.25) ; v1(58.65,17.75) v1(58.65,24.65)
  Bottom Layer w0.3: v1@23.3,57.25 v1(36.65,57.25) ; v1(36.65,24.65) v1(58.65,24.65) ; v1(58.65,17.75) 83.75,17.75 86.7,20.7 ; Q2.G 86.104,21.296 86.7,20.7 ; Q1.G 97.615,21.115 97.2,20.7 86.7,20.7
RSTZ: C15.1 CON4.5 JP5.5 R18.1 RESET.2 RESET.4 U6.12 | length 76.4
  Top Layer w0.3: RESET.4@10,55.5 v1(10,71.5) ; v1(13.35,78.65) 14.5,78.65 15,79.15 19,79.15 19.25,78.9 U6.12 ; CON4.5 26.409,45.909 27.3,46.8 v1(27.3,55.5)
  Bottom Layer w0.3: JP5.5 2.715,58.615 4.3,60.2 8.189,60.2 RESET.2 ; RESET.4@10,55.6 10,55.5 v1(27.3,55.5) ; v1(10,71.5) 13.35,74.85 v1(13.35,78.65)
RSTZ_2G: GPRS1.9 U6.36 | length 35.1
  Top Layer w0.3: GPRS1.9 13.6,38.465 v1(13.6,60.8) ; v1(17.1,60.8) 17.1,62.8 18.75,64.45 U6.36
  Bottom Layer w0.3: v1(13.6,60.8) v1(17.1,60.8)
SCK: CON4.7 JP5.3 U6.37 | length 45.5
  Top Layer w0.3: v1(18.1,44.7) v1(18.1,50) 18.1,62.5 19.25,63.65 U6.37
  Bottom Layer w0.3: JP5.3 6.602,50 v1(18.1,50) ; v1(18.1,44.7) 23.313,44.7 CON4.7
SCL: R15.1 SCL.1 U6.25 U9.3 U11.4 U12.2 | length 123.6
  Top Layer w0.25: U11.4 80.639,61.361 v1(80,62) 79.4,62.6 79.4,68.8 80.932,70.332 v1(84.632,70.332) ; v1(84.632,76.868) U9.3
  Top Layer w0.3: v1(12.4,61.9) 11.8,62.5 11.8,71.95 13.35,73.5 U6.25 ; R15.1 40.404,59.608 SCL.1 v1(40.661,61.861) ; v1(60.857,63.743) U12.2
  Bottom Layer w0.25: 59.014,61.9 61.114,59.8 77.8,59.8 v1(80,62) ; v1(84.632,70.332) v1(84.632,76.868)
  Bottom Layer w0.3: v1(12.4,61.9) 59.014,61.9 v1(60.857,63.743)
SDA: R17.1 SDA.1 U6.26 U9.2 U11.6 U12.1 | length 122.9
  Top Layer w0.25: U11.6 82.353,59.553 82.1,59.3 78.8,59.3 78.187,59.913 v1(78.187,65.013) 78.187,69.3 80.887,72 v1(82.7,72) ; v1(84.338,78.138) U9.2
  Top Layer w0.3: v1(13.3,63.1) 12.8,63.6 12.8,71.95 13.85,73 U6.26 ; v1(37.212,63.088) SDA.1 38.58,58.497 R17.1 ; v1@60.913,65.013 U12.1
  Bottom Layer w0.25: v1(82.7,72) 82.7,76.5 v1(84.338,78.138)
  Bottom Layer w0.3: v1(13.3,63.1) 57.6,63.1 59.513,65.013 v1(60.813,65.013) v1(78.187,65.013)
SHDNZ_2G: GPRS1.10 U6.41 | length 40.7
  Top Layer w0.3: GPRS1.10 12.5,39.905 v1(12.5,56.4) ; U6.41 21.25,56.75 v1(21.6,56.4)
  Bottom Layer w0.3: v1(12.5,56.4) v1(21.6,56.4)
UART0_RX: GPRS1.2 U6.46 | length 58.2
  Top Layer w0.3: v1@17.05,25.75 v1(17.05,59.35) ; v1(23.75,59.35) U6.46
  Bottom Layer w0.3: GPRS1.2 11,26.6 11.9,25.7 v1(17,25.7) ; v1(17.05,59.35) v1(23.75,59.35)
UART0_TX: GPRS1.6 U6.47 | length 52.3
  Top Layer w0.3: v1(15.8,32) v1(15.8,58.2) ; U6.47 24.25,67.45 25.1,66.6 v1(25.1,58.2)
  Bottom Layer w0.3: GPRS1.6 12.325,32 v1(15.8,32) ; v1(15.8,58.2) v1(25.1,58.2)
UART1_RX: FTDI1.2 U6.27 | length 88.5
  Top Layer w0.3: v1(1.3,43) v1(1.3,68.3) ; v1(6,43) 6,10.495 FTDI1.2 ; v1(13.7,68.3) 13.7,71.7 14.5,72.5 U6.27
  Bottom Layer w0.3: v1(1.3,43) v1(6,43) ; v1(1.3,68.3) v1(13.7,68.3)
UART1_TX: FTDI1.6 U6.28 | length 71.4
  Top Layer w0.3: v1(7.6,43.6) 7.6,13.975 FTDI1.6 ; v1(14.7,43.6) 14.7,71.4 15.3,72 U6.28
  Bottom Layer w0.3: v1(7.6,43.6) v1(14.7,43.6)
UV_OUT: C37.2 R28.2 U6.1 UV_OUT.1 | length 97.3
  Top Layer w0.3: U6.1 26.5,78.25 v1@30.85,82.6
  Top Layer w0.5: v1(51.972,46.828) UV_OUT.1@51.972,82.572
  Bottom Layer w0.3: v1(30.878,82.572) UV_OUT.1@52,82.572
  Bottom Layer w0.5: v1(51.972,46.828) C37.2 R28.2
VBAT: C3.2 C6.2 C9.2 CON3.1 D1.K D2.K GPRS_PWR.2 R3.2 R7.2 U1.1 U2.1 U3.1 VBAT.1 | length 4.9
  Bottom Layer w0.5: R7.2 v2(85.789,28.589)
  Bottom Layer w1: CON3.1@87.378,10.505 D1.K
VBAT_OUT: C7.2 Q2.S R9.2 U6.63 VBAT_OUT.1 | length 122.2
  Top Layer w0.3: U6.63 27.8,77 v1(30.1,79.3)
  Top Layer w0.5: v1(44.401,41.299) VBAT_OUT.1@44.401,79.3 ; v1(84.199,20.901) v1(84.199,41.299)
  Bottom Layer w0.3: v1(30.1,79.3) VBAT_OUT.1@44.4,79.3
  Bottom Layer w0.5: v1(44.401,41.299) v1(84.199,41.299) ; C7.2@81.269,22.132 Q2.S v1(84.199,20.901)
VPV: CON1.1 D1.A R2.2 USB_PWR.2 VPV.1 | length 112.9
  Top Layer w0.5: v2(60.4,16.5) v2(60.4,30.5)
  Bottom Layer w0.5: USB_PWR.2 26.791,30.5 v2(60.4,30.5) ; v2(60.4,16.5) 84.5,16.5 87.1,19.1 93.91,19.1 VPV.1 ; R2.2 97.741,27.259 99.1,25.9
  Bottom Layer w1: CON1.1 95.555,9.238 D1.A 94.288,16.036 VPV.1 99.1,20.848 99.1,25.9
WIND_DIR: C42.2 R35.2 U6.2 WIND_DIR.1 | length 129
  Top Layer w0.3: U6.2 24.25,78.95 24.7,79.4 26,79.4 30.9,84.3 v1(32.3,84.3)
  Top Layer w0.5: v2(55.3,39.75) 55.3,84.3 WIND_DIR.1 ; R35.2 C42.2 64.129,1.229 65.3,2.4 65.3,4.8 62.1,8 62.1,39.6 v2(61.95,39.75)
  Bottom Layer w0.3: v1(32.3,84.3) WIND_DIR.1@55.1,84.3
  Bottom Layer w0.5: v2(55.3,39.75) v2(61.95,39.75)
WIND_SPEED: C39.2 D4.A D6.K R30.1 R32.1 U6.50 | length 93.4
  Top Layer w0.3: U6.50 26.25,70.5 26.6,70.15 26.6,59.4 v1(26.9,59.1)
  Top Layer w0.5: v1(30.8,33.7) v1(30.8,59.1) ; v1(49.8,33.7) 49.8,14.6 50.659,13.741 D6.K 54.018,13.741 C39.2 54.294,13.493 v1(55.793,13.493)
  Bottom Layer w0.5: v1(26.9,59.1) v1(30.8,59.1) ; v1(30.8,33.7) v1(49.8,33.7) ; R32.1 51.978,11.778 52.364,12.164 D4.A 52.594,13.493 R30.1 v1(55.793,13.493)
pads on no net: A1. CON4.3 FTDI1.3 FTDI1.5 FTDI1.7 FTDI1.8 FTDI1.9 FTDI1.10 GPRS1.3 GPRS1.5 GPRS1.7 RAIN1. RAIN1.1 RAIN1.2 RAIN1.5 RAIN1.6 U6.13 U8.1 U8.5 U8.8 U9.5 U9.6 U9.7 U9.8 U10.3 U11.2 U11.3 U11.9 U11.11 U12.3 U13.1 U13.5 U13.8 U14.1 U14.5 U14.8 WIND1. WIND1.1 WIND1.6

## Polygon pours and split planes (outlines as drawn)
D3V3 on Top Layer "Bottom Layer-No Net" (solid, pour order 14): 39.25,87.05 39.25,100 61,100 61,81.25 34.25,81.25 34.25,73.25 55.3,73.25 55.3,49.8 55.25,49.75 80.45,49.75 80.5,49.8 81.6,48.7 81.6,31.25 27.55,31.25 27.5,31.2 27.5,35.5 18.5,35.5 18.4,35.6 18.4,0.1 18.5,0 0,0 0,88.25 17,88.25 17,80.25 23.75,80.25 23.75,88.25 34.25,88.25 39.25,88.25
A3V3 on Top Layer "Bottom Layer-No Net" (solid, pour order 12): 100,31.25 81.6,31.25 81.6,48.7 80.55,49.75 80.5,49.8 79.1,49.8 55.35,49.8 55.3,49.75 55.3,72.75 54.8,73.25 34.25,73.25 34.25,81.25 60.5,81.25 61,81.25 61,100 100,100 100,31.25
VBAT on Top Layer "Bottom Layer-No Net" (solid, pour order 4): 100,31.1 27.6,31.1 27.5,31.2 27.5,35.5 27.4,35.6 18.4,35.6 18.4,0 100,0 100,31.1
GND on Bottom Layer "Bottom Layer-No Net" (solid, pour order 16): 0,0 0,88.25 39.25,88.25 39.25,100 100,100 100,0 0,0

## Keep-outs
Keep-Out Layer:
  the board outline again, w0.25

## Other copper
Top Layer:
  rectangle net GND: 23.867,87.05 39.25,88.25
  rectangle net GND: 0.35,85.8 17.225,88.25
  rectangle net NetC19_1: 14.45,74.85 16.9,75.675
  rectangle net GND: 16.7,80.25 18.2,81.375
  rectangle net NetC10_1: 19.5,81.375 20.7,85.65
  rectangle net GND: 16.7,81.375 19,88.25
  rectangle net NetA1_1: 19.5,86.15 20.7,89.35
  rectangle net GND: 21.2,80.725 23.867,88.25
  rectangle net NetC12_1: 18.62,80.74 20.7,81.062

## Text inside footprints (layer, text, board x,y; h text height)
A3V3: Top Overlay "1" at 86.517,34.664 h0.86 r90
CON1: Top Overlay "1" at 95.355,8.876 h0.86
CON4: Top Overlay "10" at 18.169,41.914 h1.5 r270; Top Overlay "2" at 18.119,51.489 h1.5 r270; Top Overlay "1" at 27.244,51.264 h1.5 r270; Top Overlay "9" at 27.219,41.339 h1.5 r270
D3V3: Top Overlay "1" at 65.167,34.728 h0.86 r90
EXT_PWR: Top Overlay "1" at 70.862,21.633 h0.86
FTDI1: Top Overlay "1" at 12.895,3.45 h1.5 r270; Top Overlay "9" at 13.02,18.525 h1.5 r270
GPRS1: Top Overlay "1" at 12.895,26.2 h1.5 r270; Top Overlay "9" at 13.02,41.275 h1.5 r270
GPRS_PWR: Top Overlay "1" at 21.061,34.32 h0.86
IO3V3: Top Overlay "1" at 75.417,34.796 h0.86 r90
JP5: Top Overlay "2" at 9.319,49.061 h0.86 r270; Top Overlay "5" at 0.277,51.601 h0.86 r270; Top Overlay "6" at 0.277,49.061 h0.86 r270; Top Overlay "1" at 9.319,51.474 h0.86 r270
U7: Top Overlay "out" at 77.624,83.172 h0.5 r90; Top Overlay "+ve" at 78.899,83.172 h0.5 r90; Top Overlay "-ve" at 76.349,83.172 h0.5 r90
USB_PWR: Top Overlay "1" at 21.144,29.298 h0.86
UV: Top Overlay "1" at 95.397,47.567 h0.86 r90